# EAGLE board RX-FM-Super-Regenerative-Tuner-ForcedQuench (EAGLE 7.2.0)
Forced quenching improves three-transistor FM tuner Lyle Williams -February 29, 2016 http://www.edn.com/design/diy/4441531/Forced-quenching-improves-three-transistor-FM-tuner
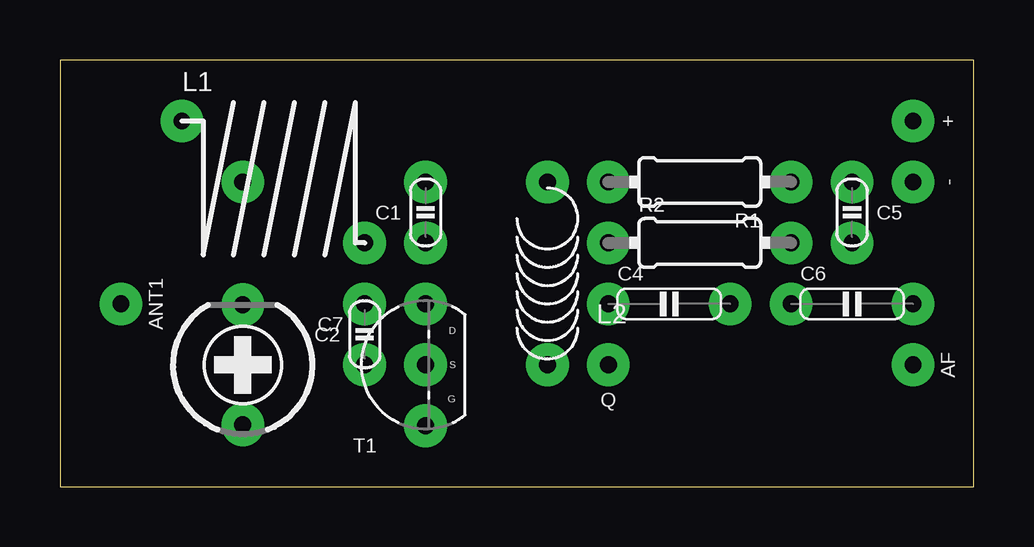
[diagram p0: board, top side]
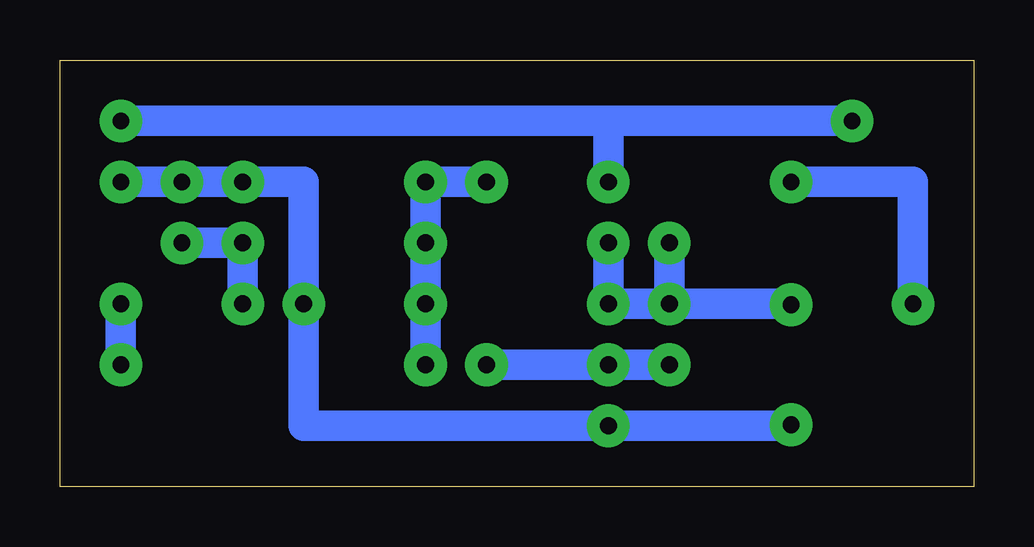
[diagram p1: board, bottom side, seen from below]

Size 38.1 x 17.78 mm. Coordinates in mm from the lower left corner, seen from the top.
Outline: 38.1,17.78 0,17.78 0,0 38.1,0 38.1,17.78
Copper layers (1*16): Top 0.035mm / dielectric 1.5mm / Bottom 0.035mm
Design rules "default": minimum track width 10mil, minimum drill 24mil, track to track 8mil, track to pad 8mil, pad to pad 8mil, via to via 8mil, smd to smd 8mil, copper to edge 40mil, drill to drill 8mil, minimum pad ring 10mil, minimum via ring 8mil, stop-mask expansion 4mil, vias tented up to drill 0mil, thermal gap 10mil
Net classes: 0 default: width 0.61 mm

## Footprints (pad centres in the part's own frame; a part is rotated, then mirrored left to right if it is on the bottom)
SPAD = drill 0.7 pad 1.778: 1 0,0
C025-015X024 = drill 0.7 pad 1.778: 1 0,1.27; 2 0,-1.27
C050-020X044 = drill 0.7 pad 1.778: 1 -2.54,0; 2 2.54,0
CTRIMTZ03 = drill 0.7 pad 1.778: 1 0,2.5; 2 0,-2.5
L-08-7/8-TAP1 = drill 0.7 pad 1.778: 1 -2.54,2.54; 2 5.08,-2.54; 3 0,0
L-04/7-V = drill 0.7 pad 1.778: 1 0,3.81; 2 0,-3.81
0204/7 = drill 0.7 pad 1.778: 1 -3.81,0; 2 3.81,0
TO92-GSD = drill 0.7 pad 1.778: 1 0,2.54; 2 0,0; 3 0,-2.54

## Placement (x,y rotation side)
+  SPAD  [SPAD]  35.56,15.24 180 top
-  SPAD  [SPAD]  35.56,12.7 180 top
AF  SPAD  [SPAD]  35.56,5.08 180 top
ANT1  ANT  [SPAD]  2.54,7.62 180 top
C1  20pF  [C025-015X024]  15.24,11.43 0 top
C2  10pF  [C025-015X024]  12.7,6.35 0 top
C4  2.7nF  [C050-020X044]  25.4,7.62 0 top
C5  10nF  [C025-015X024]  33.02,11.43 180 top
C6  100nF  [C050-020X044]  33.02,7.62 0 top
C7  0.04 - 6pF  [CTRIMTZ03]  7.62,5.08 180 top
L1  0.1μH  [L-08-7/8-TAP1]  7.62,12.7 0 top
L2  8.2μH  [L-04/7-V]  20.32,8.89 180 top
Q  SPAD  [SPAD]  22.86,5.08 90 top
R1  10kΩ  [0204/7]  26.67,12.7 180 top
R2  12kΩ  [0204/7]  26.67,10.16 0 top
T1  BF245A  [TO92-GSD]  15.24,5.08 180 top

## Library data of the parts
+ - AF ANT1 Q = pad
C1 C2 C4-C6 = c
C7 = cap-trim
L1 L2 = l
R1 R2 = r
T1 = t

## Nets
GND: -.1 C4.2 C5.2 C7.1 R1.1 T1.1
N$1: C1.2 C2.1 C7.2 L1.2 T1.3
N$2: C4.1 L2.2 Q.1 R1.2 R2.1
N$4: ANT1.1 L1.3
N$5: C2.2 L2.1 T1.2
N$6: C5.1 C6.1 R2.2
N$8: AF.1 C6.2
VCC: +.1 C1.1 L1.1

## Tracks (layer width: path | path; a pad name or v marks a point on that pad's centre or on a via)
GND
  Bottom 1.27: -.1 C5.2 R1.1 27.94,12.7 C4.2 27.94,2.54 T1.1 7.62,2.54 | 7.62,2.54
N$1
  Bottom 1.27: 7.62,7.62 | C1.2 T1.3 C2.1 | L1.2 C2.1 | C2.1 7.62,7.62
N$2
  Bottom 1.27: Q.1 C4.1 R2.1 R1.2 L2.2
N$4
  Bottom 1.27: ANT1.1 2.54,12.7 L1.3
N$5
  Bottom 1.27: T1.2 L2.1 C2.2
N$6
  Bottom 1.27: C6.1 R2.2 C5.1
N$8
  Bottom 1.27: AF.1 C6.2
VCC
  Bottom 1.27: L1.1 15.24,15.24 | C1.1 15.24,15.24 | 15.24,15.24 +.1